# EAGLE board attiny85_transistor (EAGLE 9.3.0)
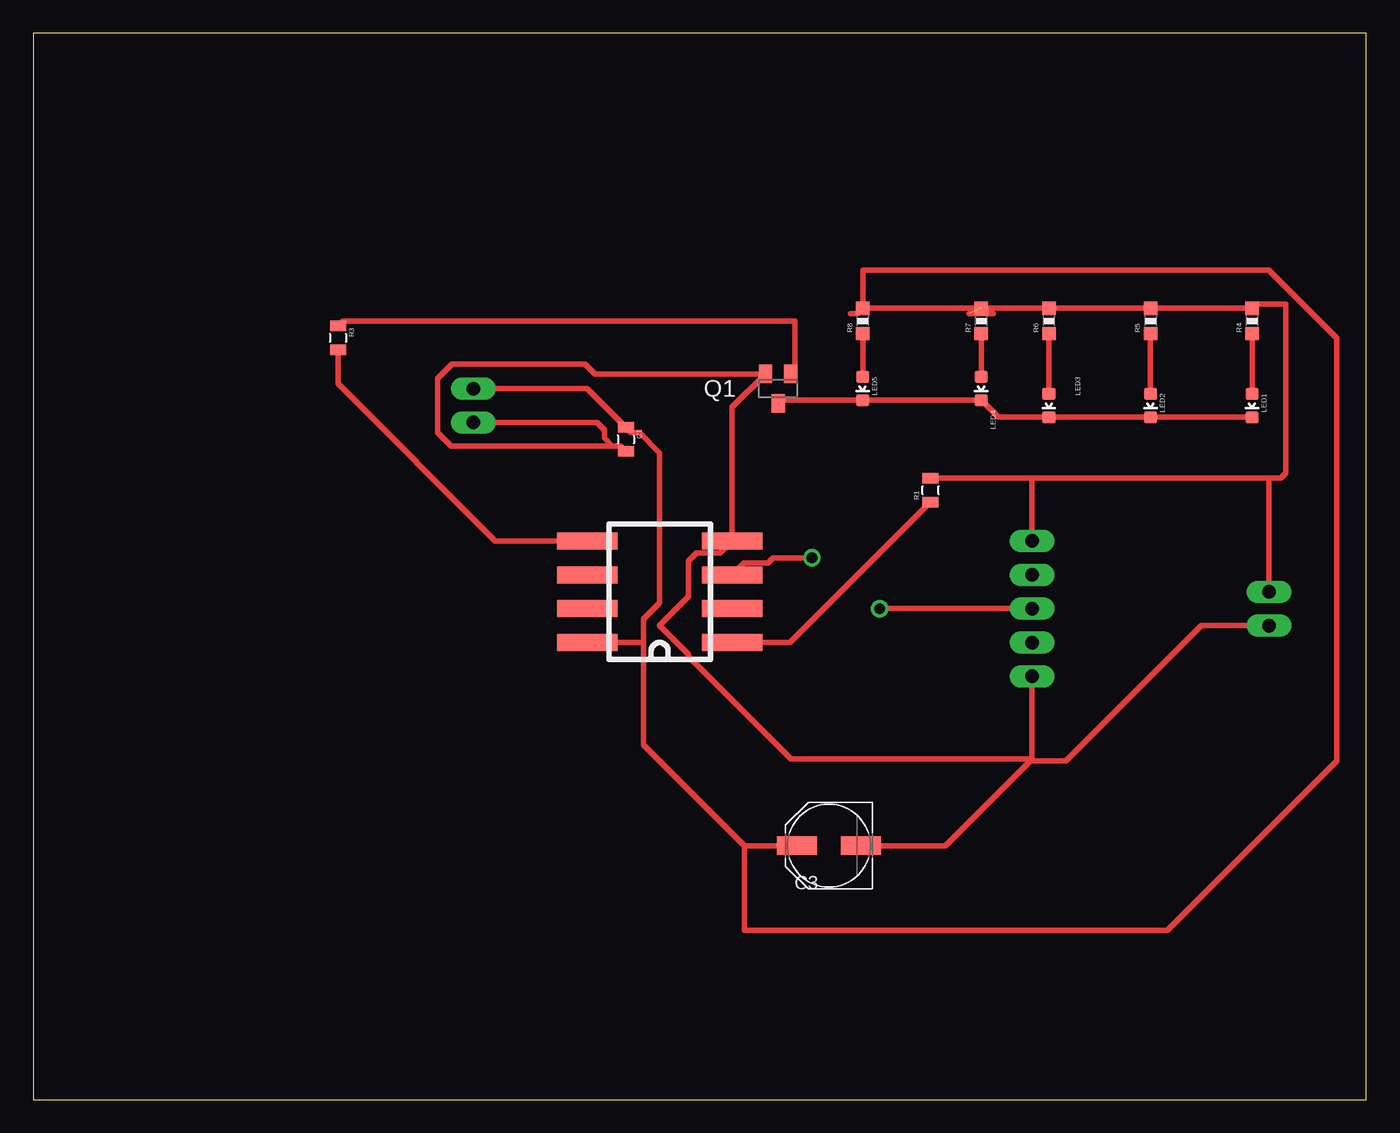
[diagram p0: board, top side]
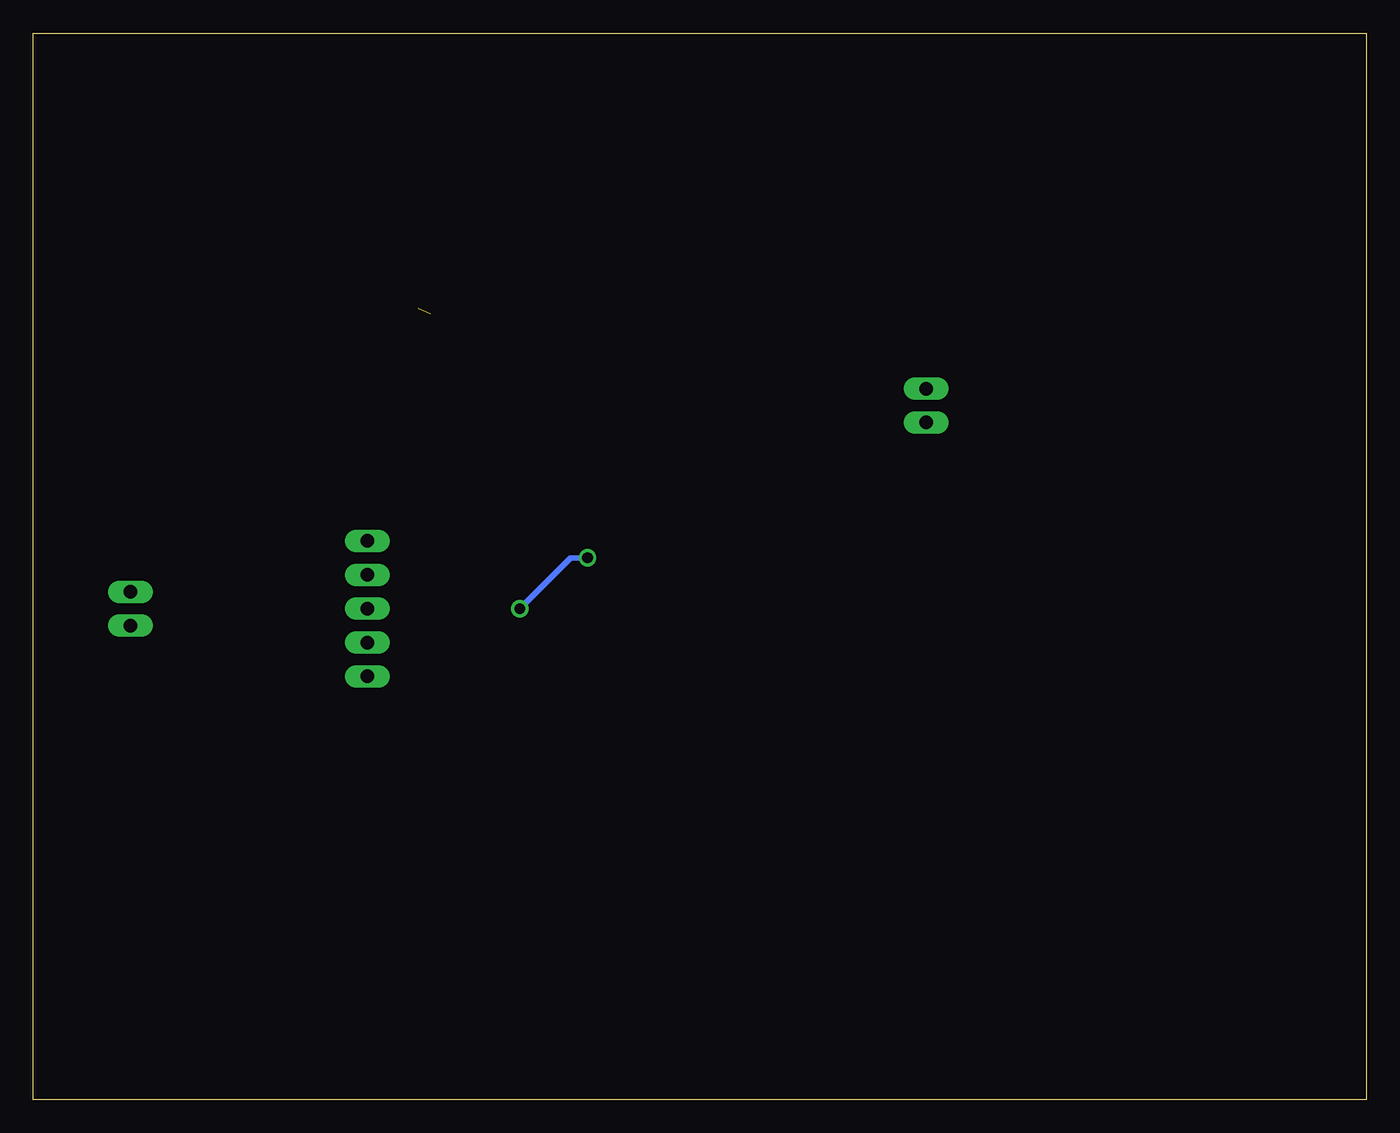
[diagram p1: board, bottom side, seen from below]

Size 100 x 80 mm. Coordinates in mm from the lower left corner, seen from the top.
Outline: 0,0 100,0 100,80 0,80 0,0
Copper layers (1*16): Top 0.035mm / dielectric 1.5mm / Bottom 0.035mm
Design rules "default": minimum track width 16mil, minimum drill 0.8mm, track to track 0.8mm, track to pad 0.8mm, pad to pad 0.8mm, via to via 0.8mm, smd to smd 0mil, copper to edge 1mil, drill to drill 1mil, minimum pad ring 10mil, minimum via ring 10mil, stop-mask expansion 1mil, vias tented up to drill 30mil, thermal gap 10mil

## Footprints (pad centres in the part's own frame; a part is rotated, then mirrored left to right if it is on the bottom)
0805 = smd 0.8 x 1.2: 1 -0.9,0; 2 0.9,0
PANASONIC_D = smd 3 x 1.4: + 2.4,0; - -2.4,0
LED-0603 = smd 1 x 0.9: A 0,-0.877; C 0,0.877
HEADER-5 = drill 1.016 pad 1.676 long: 1 0,0; 2 0,2.54; 3 0,5.08; 4 0,7.62; 5 0,10.16
SOT23 = smd 1 x 1.4: 1 -0.95,-1.1; 2 0.95,-1.1; 3 0,1.1
0603-RES = smd 1 x 1: 1 -0.95,0; 2 0.95,0
SOCKET-8PIN-BENT = smd 4.54 x 1.27: 1 -5.445,3.81; 2 -5.445,1.27; 3 -5.445,-1.27; 4 -5.445,-3.81; 5 5.445,-3.81; 6 5.445,-1.27; 7 5.445,1.27; 8 5.445,3.81
HEADER-2 = drill 1.016 pad 1.676 long: 1 0,0; 2 0,2.54

## Placement (x,y rotation side)
C1  0.1uF  [0805]  44.45,49.53 270 top
C3  100uF  [PANASONIC_D]  59.69,19.05 180 top
LED1  [LED-0603]  91.44,52.07 180 top
LED2  [LED-0603]  83.82,52.07 180 top
LED3  [LED-0603]  76.2,52.07 180 top
LED4  [LED-0603]  71.12,53.34 180 top
LED5  [LED-0603]  62.23,53.34 180 top
POTENTIOMETER  HEADER-5  [HEADER-5]  74.93,41.91 180 top
Q1  BSH103  [SOT23]  55.88,53.34 180 top
R1  10k  [0805]  67.31,45.72 90 top
R3  150  [0805]  22.86,57.15 270 top
R4  [0603-RES]  91.44,58.42 90 top
R5  [0603-RES]  83.82,58.42 90 top
R6  [0603-RES]  76.2,58.42 90 top
R7  [0603-RES]  71.12,58.42 90 top
R8  [0603-RES]  62.23,58.42 90 top
U$1  ATTINY85-SOCKET-BENT  [SOCKET-8PIN-BENT]  46.99,38.1 180 top
U$2  HEADER-2  [HEADER-2]  92.71,35.56 0 top
U$3  HEADER-2  [HEADER-2]  33.02,53.34 180 top

## Library data of the parts
C1 C3 LED1-LED5 POTENTIOMETER R1 R3-R8 U$1-U$3 = homemade-hardware
Q1 = adafruit

## Nets
5V: C1.1 C3.+ POTENTIOMETER.1 R1.2 R4.2 R5.2 R6.2 R7.2 R8.2 U$1.8 U$2.2 U$3.1
GND: C1.2 C3.- POTENTIOMETER.5 Q1.2 U$1.4 U$2.1 U$3.2
N$1: LED1.A R4.1
N$3: R3.2 U$1.5
N$4: LED1.C LED2.C LED3.C LED4.C LED5.C Q1.3
N$5: Q1.1 R3.1
N$7: LED2.A R5.1
N$8: LED3.A R6.1
N$9: LED4.A R7.1
N$10: LED5.A R8.1
N$12: R1.1 U$1.1
SENSOR: POTENTIOMETER.3 U$1.3

## Tracks (layer width: path | path; a pad name or v marks a point on that pad's centre or on a via)
5V  (1 unrouted)
  Top 0.406: R8.2 R7.2 R6.2 R5.2 R4.2 91.76,59.69 93.98,59.69 93.98,46.99 93.61,46.62 92.71,46.62 | R1.2 74.93,46.62 | 74.93,46.62 92.71,46.62 | U$2.2 92.71,46.62 | U$3.1 41.54,53.34 C1.1 44.85,50.03 45.47,50.03 46.99,48.51 46.99,37.27 45.78,36.06 45.78,34.35 | POTENTIOMETER.1 74.93,46.62 | R8.2 61.83,58.97 61.31,58.97 | 70.2,58.97 72.04,58.97 | 45.78,34.35 45.72,34.29 U$1.8 | 45.78,34.35 45.78,26.61 53.34,19.05 | 53.34,19.05 C3.+ | R8.2 62.23,62.23 92.71,62.23 97.79,57.15 97.79,25.4 85.09,12.7 53.34,12.7 53.34,19.05
GND
  Top 0.406: 74.79,25.4 77.47,25.4 87.63,35.56 U$2.1 | 74.79,25.4 68.44,19.05 C3.- | 74.79,25.4 74.93,25.54 | 74.93,25.54 POTENTIOMETER.5 | U$3.2 42.28,50.8 42.85,50.23 42.85,49.61 43.43,49.03 | 74.93,25.54 56.86,25.54 49.16,33.24 49.16,33.39 46.99,35.56 49.16,37.73 49.16,40.42 49.75,41.01 51.53,41.01 U$1.4 52.44,51.95 Q1.2 42.15,54.44 41.41,55.18 31.42,55.18 30.34,54.1 30.34,50.04 31.35,49.03 43.43,49.03 | C1.2 44.05,49.03 43.43,49.03
N$1
  Top 0.406: R4.1 LED1.A
N$3
  Top 0.406: R3.2 22.86,53.71 34.66,41.91 U$1.5
N$4
  Top 0.406: LED1.C LED2.C LED3.C 72.39,51.19 LED4.C LED5.C 56.1,52.46 Q1.3
N$5
  Top 0.406: Q1.1 57.15,54.76 57.15,58.42 23.23,58.42 R3.1
N$7
  Top 0.406: R5.1 LED2.A
N$8
  Top 0.406: R6.1 LED3.A
N$9
  Top 0.406: 71.12,54.93 LED4.A R7.1
N$10
  Top 0.406: R8.1 LED5.A
N$12
  Top 0.406: R1.1 56.78,34.29 U$1.1
SENSOR  (via drill 0.8)
  Top 0.406: POTENTIOMETER.3 v63.5,36.83 | v58.42,40.64 55.49,40.64 55.12,40.27 53.34,40.27 U$1.3
  Bottom 0.406: v63.5,36.83 59.69,40.64 v58.42,40.64